# EAGLE board lmzmv1_0 (EAGLE 9.6.2)
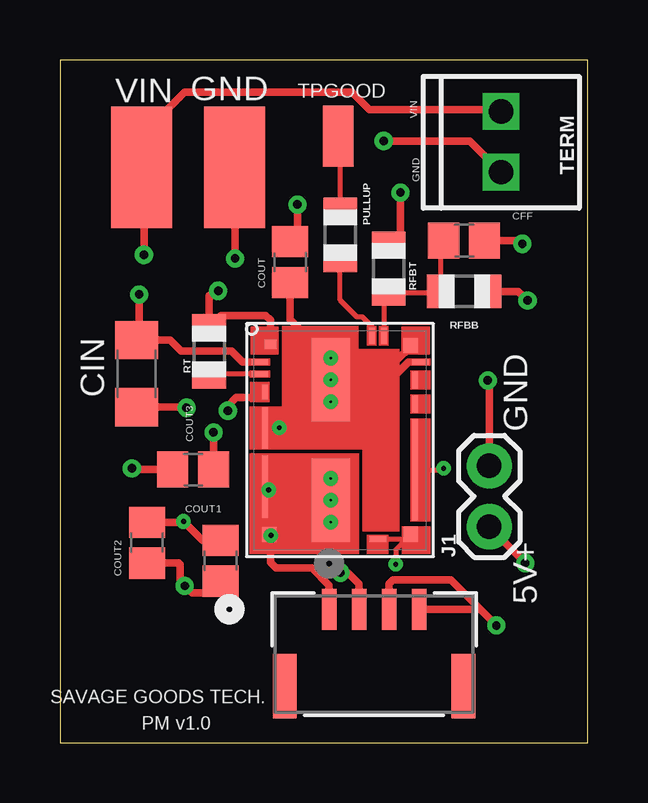
[diagram p0: board, top side]
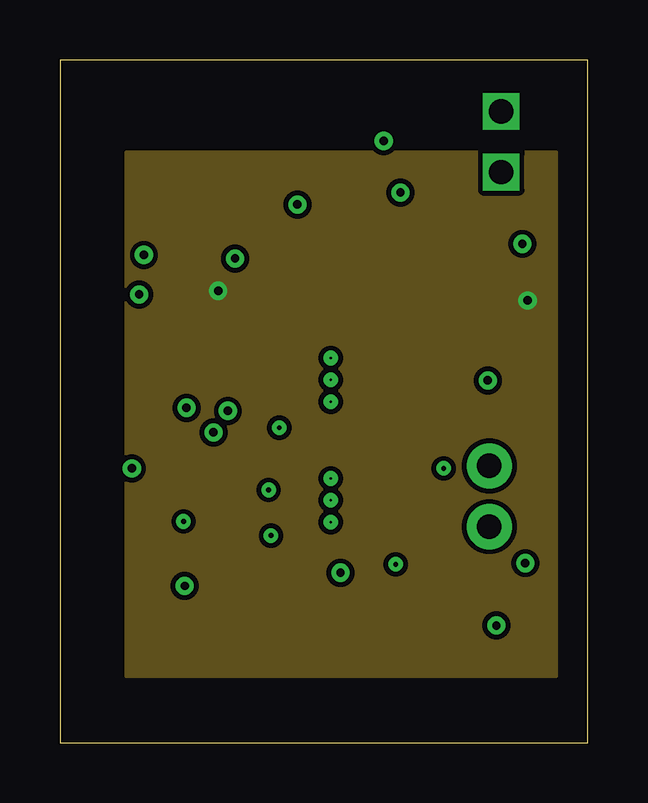
[diagram p1: board, inner layer Route2]
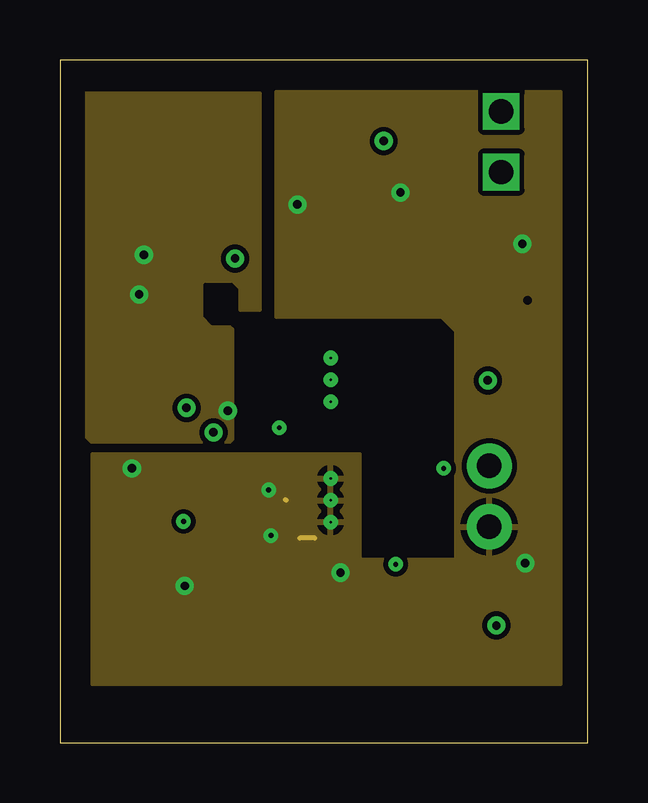
[diagram p2: board, inner layer Route15]
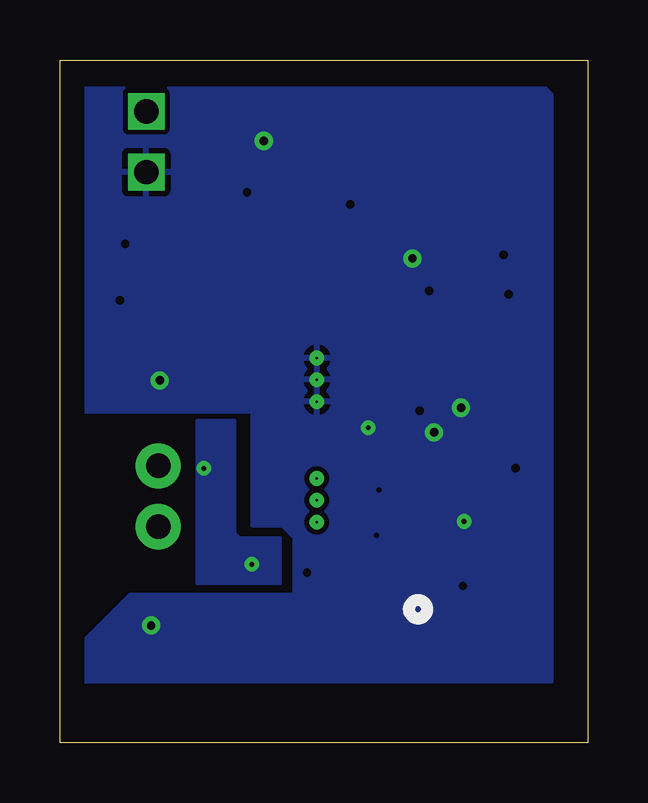
[diagram p3: board, bottom side, seen from below]

Size 22 x 28.48 mm. Coordinates in mm from the lower left corner, seen from the top.
Outline: 0,0 22,0 22,28.48 0,28.48 0,0
Copper layers [15:(1+2*15+16)]: Top 0.035mm / dielectric 1.5mm / Route2 0.035mm / dielectric 0.15mm / Route15 0.035mm / dielectric 0.2mm / Bottom 0.035mm
Design rules "default *": minimum track width 8mil, minimum drill 0.35mm, track to track 8mil, track to pad 8mil, pad to pad 6mil, via to via 6mil, smd to smd 6mil, copper to edge 40mil, drill to drill 6mil, minimum pad ring 10mil, minimum via ring 8mil, stop-mask expansion 4mil, vias tented up to drill 15mil, thermal gap 10mil

## Footprints (pad centres in the part's own frame; a part is rotated, then mirrored left to right if it is on the bottom)
C0805 = smd 1.3 x 1.5: 1 -0.85,0; 2 0.85,0
C1206 = smd 1.6 x 1.8: 1 -1.4,0; 2 1.4,0
CONN_SM04B-GHS-TB_JST = smd 0.61 x 1.702: 1 -1.875,1.876; 2 -0.625,1.876; 3 0.625,1.876; 4 1.875,1.876 | smd 0.991 x 2.692: 5 -3.725,-1.324; 6 3.725,-1.324
SMD2,54-5,08 = smd 2.54 x 5.08: 1 0,0
1X02 = drill 1.016 pad 1.88: 1 0,0; 2 2.54,0
QFN-18 = smd 0.5 x 0.4: 1 -2.9,4 | smd 0.7 x 0.25: 2 -3.35,3.25; 3 -3.35,2.75; 9 1.58,-4.127; 14 3.35,3.25 | smd 0.25 x 0.635: 4 -3.129,2 | smd 0.25 x 1.74: 5 -3.129,0.49 | smd 0.25 x 2.6: 6 -3.129,-1.95 | smd 0.595 x 0.62: 7 -2.947,-3.935; 10 2.947,-3.935; 15 2.947,3.935 | smd 1.6 x 3.48: 8 -0.395,-2.51; 18 -0.395,2.51 | smd 0.25 x 4.25: 11 3.129,-1.25 | smd 0.25 x 0.7: 12 3.129,1.5; 13 3.129,2.5; 16 1.83,4.35; 17 1.33,4.35 | drill 0.1 pad 0.2: W -0.395,3.42; W1 -0.395,2.52; W2 -0.395,1.6; X -0.395,-1.6; X1 -0.395,-2.51; X2 -0.395,-3.42
R0805 = smd 1.1 x 1.4: 1 -1,0; 2 1,0
1X02_2.54_SCREWTERM = drill 1.016 square: P1 2.54,0; P2 0,0
SMD1,27-2,54 = smd 1.27 x 2.54: 1 0,0

## Placement (x,y rotation side)
CFF  100pF  [C0805]  16.85,20.95 0 top
CIN  [C1206]  3.2,15.4 90 top
COUT  22uF  [C0805]  9.6,20.05 270 top
COUT1  22uF  [C0805]  6.7,7.6 90 top
COUT2  22uF  [C0805]  3.63,8.35 90 top
COUT3  22uF  [C0805]  5.55,11.4 0 top
E$1  [CONN_SM04B-GHS-TB_JST]  13.1,3.7 0 top
GND  [SMD2,54-5,08]  7.28,24 0 top
J1  [1X02]  17.9,9.02 90 top
LMZM33603  [QFN-18]  11.68,12.63 0 top
PULLUP  10K  [R0805]  11.68,21.18 270 top
RFBB  10K  [R0805]  16.86,18.83 180 top
RFBT  40.2K  [R0805]  13.7,19.78 270 top
RT  88.7K  [R0805]  6.22,16.33 90 top
TERM  [1X02_2.54_SCREWTERM]  18.4,23.8 90 top
TPGOOD  [SMD1,27-2,54]  11.6,25.3 180 top
VIN  [SMD2,54-5,08]  3.4,24 0 top

## Library data of the parts
CFF = adafruit; MPN: CC0603JRNPO9BN101; OC_NEWARK: 68R4713
CIN = adafruit
COUT COUT1-COUT3 = adafruit; MPN: F980G226MMA; OC_NEWARK: 84R8910
E$1 = 2022-04-15_21-05-46_Library
GND TPGOOD VIN = wirepad
J1 = SparkFun-Connectors; OC_NEWARK: unknown
LMZM33603 = lmzm33603; MPN: LMZM33603RLRR; OC_NEWARK: 56AC5830
PULLUP RFBB = adafruit; MPN: RC0603FR-0710KL; OC_NEWARK: 68R0049
RFBT = adafruit; MPN: MC0603SAF4022T5E; OC_NEWARK: 04P0417
RT = adafruit; MPN: ERJ-S03D8872V; OC_NEWARK: 65AC7547
TERM = SparkFun-Connectors

## Nets
AGND: LMZM33603.1 RFBB.1 RT.2
FB: CFF.1 LMZM33603.16 RFBB.2 RFBT.2
GND: CIN.1 COUT1.2 COUT2.2 COUT3.2 COUT.2 E$1.3 E$1.4 GND.1 J1.2 LMZM33603.5 LMZM33603.14 LMZM33603.15 LMZM33603.18 LMZM33603.W LMZM33603.W1 LMZM33603.W2 TERM.P2
PGOOD: LMZM33603.17 PULLUP.2
RT: LMZM33603.3 RT.1
SW: LMZM33603.9 LMZM33603.10 LMZM33603.11
TPGOOD: PULLUP.1 TPGOOD.1
VIN: CIN.2 LMZM33603.2 LMZM33603.4 TERM.P1 VIN.1
VOUT: CFF.2 COUT1.1 COUT2.1 COUT3.1 COUT.1 E$1.1 E$1.2 J1.1 LMZM33603.6 LMZM33603.7 LMZM33603.8 LMZM33603.X LMZM33603.X1 LMZM33603.X2 RFBT.1

## Tracks (layer width: path | path; a pad name or v marks a point on that pad's centre or on a via)
AGND  (via drill 0.35 layers 1-2)
  Top 0.305: LMZM33603.1 8.78,17.63 8.58,17.83 6.72,17.83 RT.2 6.22,18.66 6.5,18.85 v6.6,18.85 | RFBB.1 19.12,18.83 v19.5,18.45
  pour Route2 (no thermals): 2.75,2.78 2.75,24.64 20.7,24.64 20.7,2.78
FB
  Top 0.203: CFF.1 15.86,20.81 RFBB.2 15.81,18.78 RFBT.2 13.51,18.59 LMZM33603.16
GND  (via drill 0.2, 0.35)
  Top 0.203: 9.12,13.12 v9.14,13.15
  Top 0.305: v6.4,12.95 COUT3.2 | 6.8,8.55 COUT1.2 | 6.65,8.4 COUT1.2 | COUT.2 9.6,17.65 11.3,15.95 | 11.3,15.95 11.29,15.94 LMZM33603.18 LMZM33603.W2 | LMZM33603.14 14.53,15.88 12.88,14.23 LMZM33603.W2 | LMZM33603.W2 | LMZM33603.15 14.63,16.54 14.04,15.95 11.3,15.95 | LMZM33603.5 9.12,13.12 | COUT2.2 5.12,9.2 v5.16,9.24 5.94,8.45 COUT1.2 | CIN.1 5.28,14 v5.28,13.98 | GND.1 7.3,23.98 v7.3,20.2 | v13.5,25.1 17.1,25.1 TERM.P2 | v17.84,15.12 17.9,15.06 J1.2 | E$1.4 17.52,5.58 v18.2,4.9 16.31,6.79 13.89,6.79 13.72,6.62 E$1.3
  pour Bottom: 12.25,6.2 12.25,8.55 12.75,9.05 14,9.05 14,13.8 21,13.8 21,27.3 1.75,27.3 1.5,27.05 1.5,2.55 21,2.55 21,4.3 19.1,6.2
PGOOD
  Top 0.203: PULLUP.2 11.68,18.47 12.37,17.78 12.6,17.78 13.01,17.37 LMZM33603.17
RT
  Top 0.203: LMZM33603.3 6.25,15.38 RT.1
SW  (via drill 0.2)
  Top 0.203: LMZM33603.9 14.44,8.5 14,8.07 v14,7.45 | LMZM33603.11 15.93,11.38 v16,11.45
  Top 0.305: LMZM33603.10 14.44,8.5
  pour Bottom: 12.8,8.55 14.5,8.55 14.7,8.75 14.7,13.45 16.3,13.45 16.3,6.65 12.8,6.65
TPGOOD
  Top 0.203: TPGOOD.1 11.68,25.22 PULLUP.1
VIN  (via drill 0.35 layers 1-15)
  Top 0.305: 3.3,16.8 4.59,16.8 5.05,16.35 7.15,16.35 7.62,15.88 LMZM33603.2 | 3.3,16.8 CIN.2 2.64,16.8 2.52,16.92 | LMZM33603.4 8.32,14.4 7.35,14.4 7,14.05 v7,13.85 | v3.5,20.35 3.5,23.9 VIN.1 3.4,25.33 5.2,27.13 12.18,27.13 12.91,26.4 18.34,26.4 TERM.P1 | v3.3,18.7 3.3,16.8
  pour Route15 (no thermals): 1.3,12.55 7.1,12.55 7.2,12.65 7.2,17.25 7.1,17.35 6.3,17.35 5.9,17.75 5.9,19.15 6,19.25 7.2,19.25 7.5,18.95 7.5,18.05 8.35,18.05 8.35,27.1 0.95,27.1 0.95,12.9
VOUT  (via drill 0.2 layers 1-15, 0.35 layers 1-15)
  Top 0.203: LMZM33603.6 8.68,10.55 v8.7,10.55 | LMZM33603.7 8.78,8.65 v8.8,8.65
  Top 0.305: 11.29,10.02 LMZM33603.X1 | COUT.1 9.9,21.2 v9.9,22.45 | RFBT.1 14.2,21.17 v14.2,22.95 | COUT3.1 3.05,11.4 v3,11.45 | COUT2.1 4.95,7.5 5,7.45 5,6.75 v5.2,6.55 5.5,6.25 6.2,6.25 COUT1.1 | J1.1 v19.41,7.51 v19.4,7.5 | CFF.2 19.14,20.95 v19.28,20.81 | 8.78,8.65 8.78,7.52 9,7.3 10.5,7.3 11.22,6.58 E$1.1 | v11.7,7.1 12,7.1 12.47,6.62 E$1.2
  Route15 0.203: 10.62,8.55 10,8.55 | 9.43,10.12 9.4,10.15
  pour Route15: 1.35,12.05 1.35,2.45 20.89,2.45 20.89,27.15 9,27.15 9,17.75 15.9,17.75 16.5,17.15 16.5,7.65 12.5,7.65 12.5,12.05

## Text on the board
tPlace: VIN | GND | GND | 5V+ | SAVAGE GOODS TECH. | PM v1.0